# EAGLE board Orbiter_V3_2 (EAGLE 8.7.1)
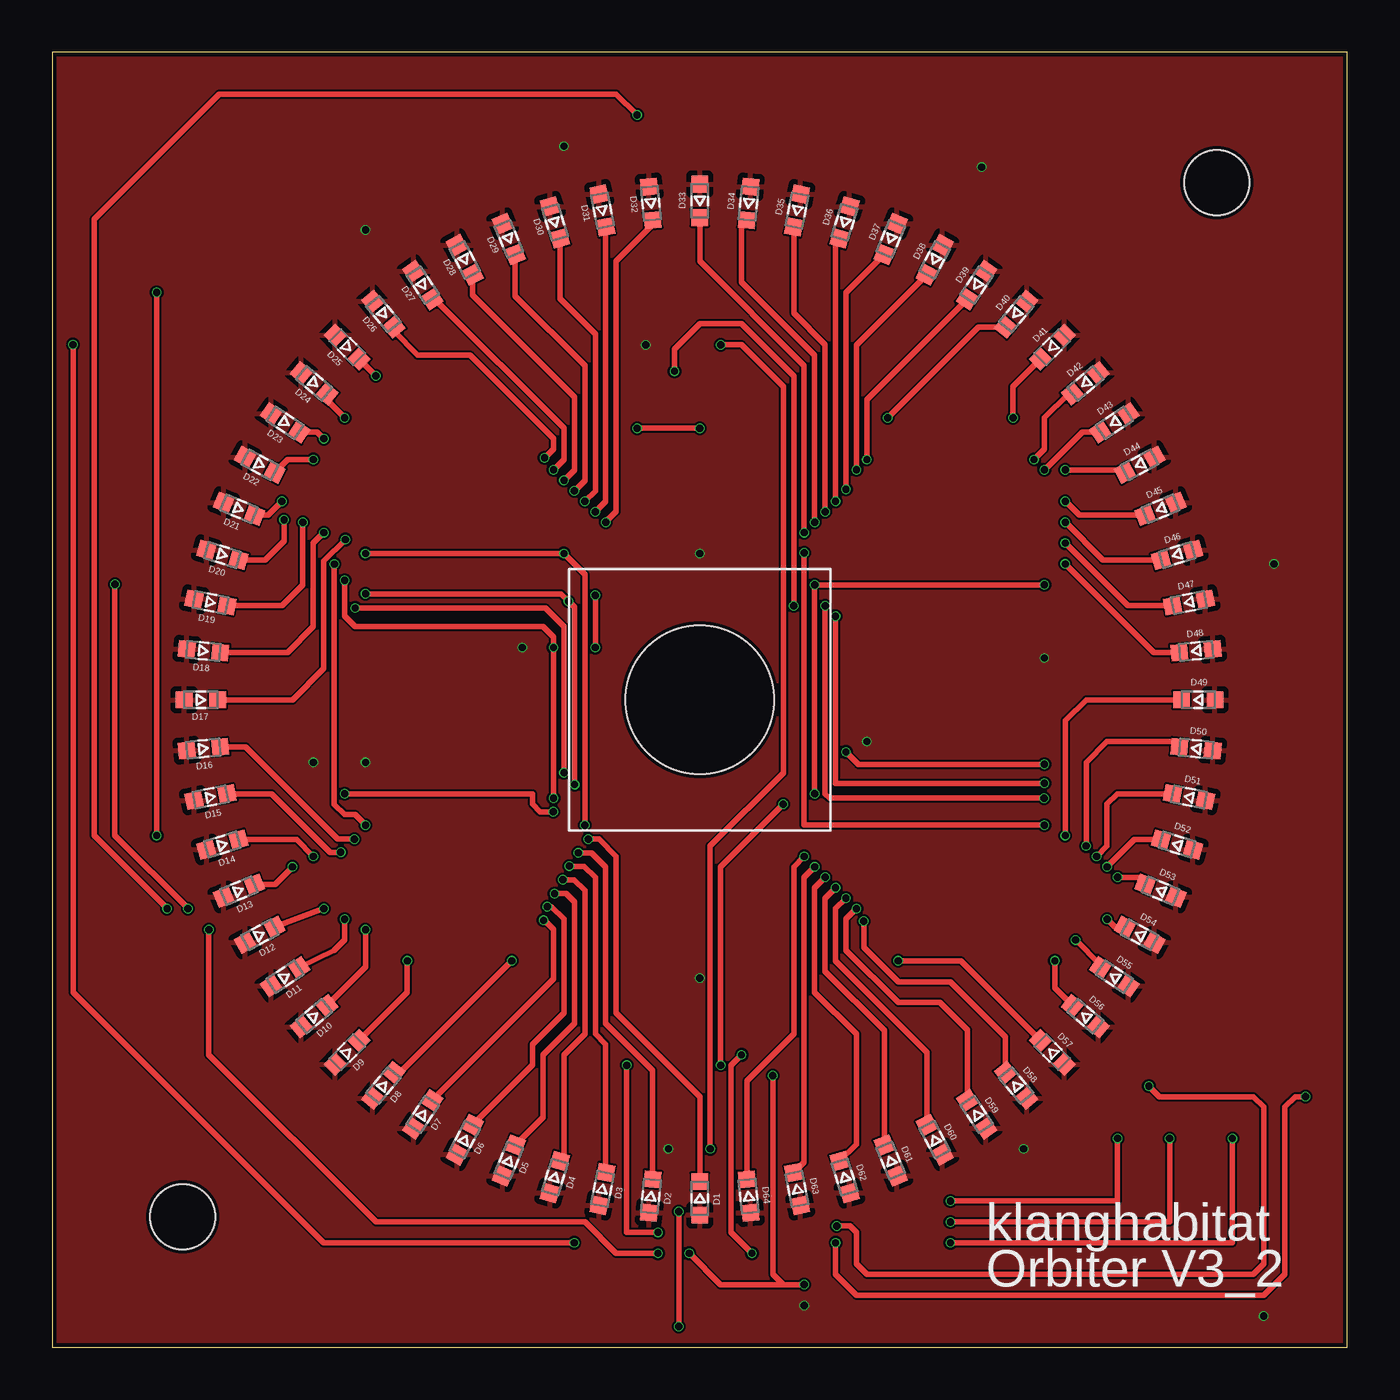
[diagram p0: board, top side]
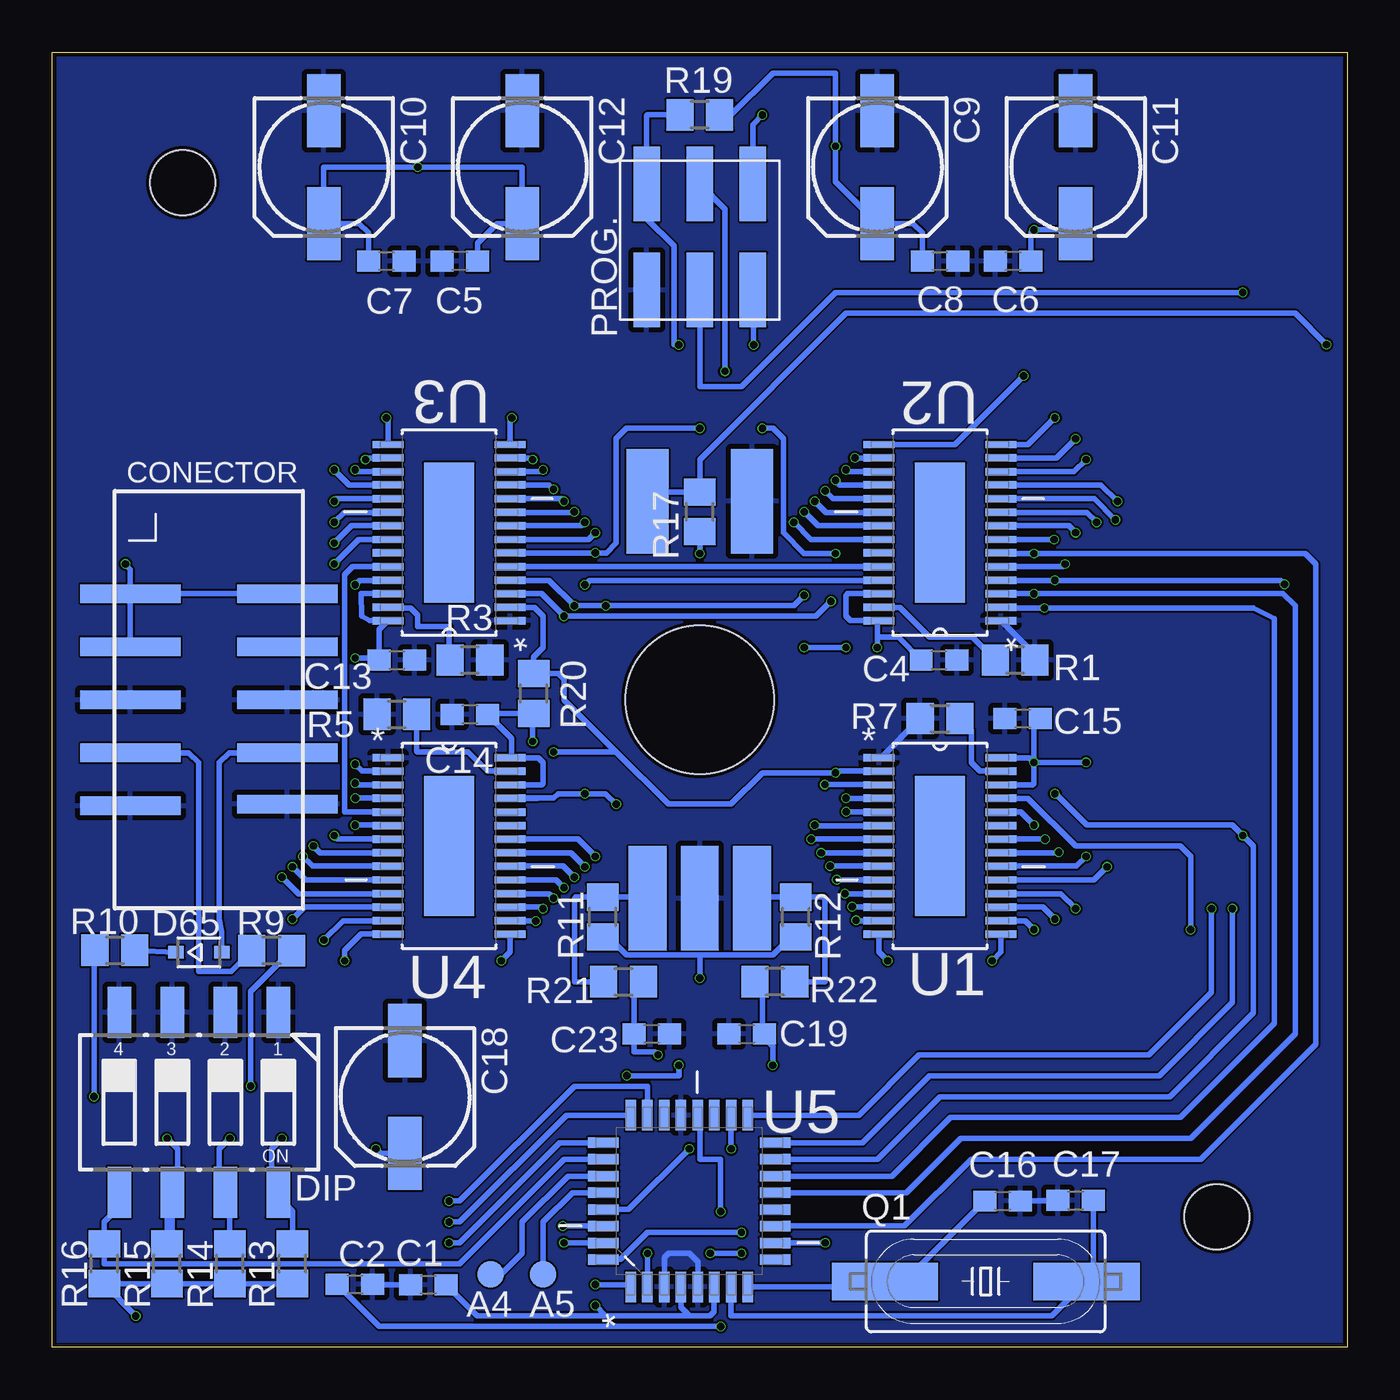
[diagram p1: board, bottom side, seen from below]

Size 62 x 62 mm. Coordinates in mm from the lower left corner, seen from the top.
Outline: 0,0 62,0 62,62 0,62 0,0
Copper layers (1*16): Top 0.035mm / dielectric 1.5mm / Bottom 0.035mm
Design rules "aisler_go_2layer": minimum track width 0.1mm, minimum drill 0.2mm, track to track 0.1mm, track to pad 0.1mm, pad to pad 0.1mm, via to via 0.1mm, smd to smd 0.1mm, copper to edge 0.2mm, drill to drill 0.21mm, minimum pad ring 0.25mm, minimum via ring 0.05mm, stop-mask expansion 0.01mm, vias tented up to drill 0mil, thermal gap 10mil
Holes 3.1 mm at 6.25,6.25 55.75,55.75

## Footprints (pad centres in the part's own frame; a part is rotated, then mirrored left to right if it is on the bottom)
TP = smd 1.27 x 1.27: P$1 0,0
C0603 = smd 1.1 x 1: 1 -0.85,0; 2 0.85,0
153CLV-0605 = smd 3.5 x 1.6: + 2.7,0; - -2.7,0
87832-10 = smd 0.89 x 4.8: 1 -5.08,-3.759; 2 -5.08,3.757; 3 -2.54,-3.759; 4 -2.54,3.757; 5 0,-3.759; 6 0,3.757; 7 2.54,-3.759; 8 2.54,3.757; 9 5.08,-3.759; 10 5,3.757
WL-SMCW_0603 = smd 0.8 x 0.8: 1 -0.8,0; 2 0.8,0
SOD323-R = smd 0.762 x 0.6: A 1.1,0; C -1.1,0
CTS-219-04 = smd 1.13 x 2.44: 1 -3.81,-4.3; 2 -1.27,-4.3; 3 1.27,-4.3; 4 3.81,-4.3; 5 3.81,4.3; 6 1.27,4.3; 7 -1.27,4.3; 8 -3.81,4.3
BOURNS_ENCODER_SMD = smd 2 x 5 bottom: S1 -2.5,9.5; S2 2.5,9.5 | smd 1.8 x 5 bottom: TA 2.5,-9.5; TB -2.5,-9.5; VDC 0,-9.5 | hole 7.1: 0,0
6PIN_HEADER_SMD_OPEN = smd 1.27 x 3.56: 1 -2.54,-2.7; 2 -2.54,2.38; 3 0,-2.7; 4 0,2.38; 5 2.54,-2.7; 6 2.54,2.38
SM49 = smd 5.08 x 1.778: 1 -4.826,0; 2 4.826,0
R0805 = smd 1.3 x 1.5: 1 -0.95,0; 2 0.95,0
SOP65P640X120-29N = smd 1.473 x 0.356: 1 -2.921,4.216; 2 -2.921,3.581; 3 -2.921,2.921; 4 -2.921,2.286; 5 -2.921,1.626; 6 -2.921,0.965; 7 -2.921,0.33; 8 -2.921,-0.33; 9 -2.921,-0.965; 10 -2.921,-1.626; 11 -2.921,-2.286; 12 -2.921,-2.921; 13 -2.921,-3.581; 14 -2.921,-4.216; 15 2.921,-4.216; 16 2.921,-3.581; 17 2.921,-2.921; 18 2.921,-2.286; 19 2.921,-1.626; 20 2.921,-0.965; 21 2.921,-0.33; 22 2.921,0.33; 23 2.921,0.965; 24 2.921,1.626; 25 2.921,2.286; 26 2.921,2.921; 27 2.921,3.581; 28 2.921,4.216 | smd 2.4 x 6.7: THERMAL 0,0
QFP80P900X900X120-32N = smd 1.473 x 0.508: 1 -4.115,2.794; 2 -4.115,2.007; 3 -4.115,1.194; 4 -4.115,0.406; 5 -4.115,-0.406; 6 -4.115,-1.194; 7 -4.115,-2.007; 8 -4.115,-2.794; 17 4.115,-2.794; 18 4.115,-2.007; 19 4.115,-1.194; 20 4.115,-0.406; 21 4.115,0.406; 22 4.115,1.194; 23 4.115,2.007; 24 4.115,2.794 | smd 0.508 x 1.473: 9 -2.794,-4.115; 10 -2.007,-4.115; 11 -1.194,-4.115; 12 -0.406,-4.115; 13 0.406,-4.115; 14 1.194,-4.115; 15 2.007,-4.115; 16 2.794,-4.115; 25 2.794,4.115; 26 2.007,4.115; 27 1.194,4.115; 28 0.406,4.115; 29 -0.406,4.115; 30 -1.194,4.115; 31 -2.007,4.115; 32 -2.794,4.115

## Placement (x,y rotation side)
A4  TPSMD  [TP]  41.02,3.5 180 bottom
A5  TPSMD  [TP]  38.5,3.5 180 bottom
C1  1uF  [C0603]  44,3 0 bottom
C2  100nF  [C0603]  47.5,3.01 180 bottom
C4  100n  [C0603]  19.55,32.9 0 bottom
C5  100n  [C0603]  42.48,52 180 bottom
C6  100n  [C0603]  15.99,52 180 bottom
C7  100n  [C0603]  46,52 0 bottom
C8  100n  [C0603]  19.5,52 0 bottom
C9  10u  [153CLV-0605]  22.5,56.5 270 bottom
C10  10u  [153CLV-0605]  49,56.5 270 bottom
C11  10u  [153CLV-0605]  13,56.5 270 bottom
C12  10u  [153CLV-0605]  39.5,56.5 270 bottom
C13  100n  [C0603]  45.5,32.9 0 bottom
C14  100n  [C0603]  42,30.3 180 bottom
C15  100n  [C0603]  15.55,30.1 180 bottom
C16  22p  [C0603]  16.5,7 0 bottom
C17  22p  [C0603]  13,7.03 0 bottom
C18  4,7uF/16V  [153CLV-0605]  45.11,11.98 270 bottom
C19  10nF  [C0603]  28.75,15 0 bottom
C23  10nF  [C0603]  33.3,15 180 bottom
CONECTOR  10PIN_HEADER_SMD  [87832-10]  54.5,31 270 bottom
D1  SMD_LED_0603  [WL-SMCW_0603]  31,7.13 270 top
D2  SMD_LED_0603  [WL-SMCW_0603]  28.66,7.24 264.4 top
D3  SMD_LED_0603  [WL-SMCW_0603]  26.34,7.58 258.8 top
D4  SMD_LED_0603  [WL-SMCW_0603]  24.07,8.15 253.1 top
D5  SMD_LED_0603  [WL-SMCW_0603]  21.86,8.94 247.5 top
D6  SMD_LED_0603  [WL-SMCW_0603]  19.75,9.94 241.9 top
D7  SMD_LED_0603  [WL-SMCW_0603]  17.74,11.15 236.3 top
D8  SMD_LED_0603  [WL-SMCW_0603]  15.85,12.54 230.6 top
D9  SMD_LED_0603  [WL-SMCW_0603]  14.12,14.12 225 top
D10  SMD_LED_0603  [WL-SMCW_0603]  12.54,15.85 219.4 top
D11  SMD_LED_0603  [WL-SMCW_0603]  11.15,17.74 213.8 top
D12  SMD_LED_0603  [WL-SMCW_0603]  9.94,19.75 208.1 top
D13  SMD_LED_0603  [WL-SMCW_0603]  8.94,21.86 202.5 top
D14  SMD_LED_0603  [WL-SMCW_0603]  8.15,24.07 196.9 top
D15  SMD_LED_0603  [WL-SMCW_0603]  7.58,26.34 191.3 top
D16  SMD_LED_0603  [WL-SMCW_0603]  7.24,28.66 185.6 top
D17  SMD_LED_0603  [WL-SMCW_0603]  7.12,31 180 top
D18  SMD_LED_0603  [WL-SMCW_0603]  7.24,33.34 174.4 top
D19  SMD_LED_0603  [WL-SMCW_0603]  7.58,35.66 168.8 top
D20  SMD_LED_0603  [WL-SMCW_0603]  8.15,37.93 163.1 top
D21  SMD_LED_0603  [WL-SMCW_0603]  8.94,40.14 157.5 top
D22  SMD_LED_0603  [WL-SMCW_0603]  9.94,42.25 151.9 top
D23  SMD_LED_0603  [WL-SMCW_0603]  11.15,44.26 146.3 top
D24  SMD_LED_0603  [WL-SMCW_0603]  12.54,46.15 140.6 top
D25  SMD_LED_0603  [WL-SMCW_0603]  14.12,47.88 135 top
D26  SMD_LED_0603  [WL-SMCW_0603]  15.85,49.46 129.4 top
D27  SMD_LED_0603  [WL-SMCW_0603]  17.74,50.85 123.8 top
D28  SMD_LED_0603  [WL-SMCW_0603]  19.75,52.06 118.2 top
D29  SMD_LED_0603  [WL-SMCW_0603]  21.86,53.06 112.5 top
D30  SMD_LED_0603  [WL-SMCW_0603]  24.07,53.85 106.9 top
D31  SMD_LED_0603  [WL-SMCW_0603]  26.34,54.42 101.3 top
D32  SMD_LED_0603  [WL-SMCW_0603]  28.66,54.76 95.6 top
D33  SMD_LED_0603  [WL-SMCW_0603]  31,54.88 90 top
D34  SMD_LED_0603  [WL-SMCW_0603]  33.34,54.76 84.4 top
D35  SMD_LED_0603  [WL-SMCW_0603]  35.66,54.42 78.8 top
D36  SMD_LED_0603  [WL-SMCW_0603]  37.93,53.85 73.1 top
D37  SMD_LED_0603  [WL-SMCW_0603]  40.14,53.06 67.5 top
D38  SMD_LED_0603  [WL-SMCW_0603]  42.25,52.06 61.9 top
D39  SMD_LED_0603  [WL-SMCW_0603]  44.26,50.85 56.3 top
D40  SMD_LED_0603  [WL-SMCW_0603]  46.15,49.46 50.6 top
D41  SMD_LED_0603  [WL-SMCW_0603]  47.88,47.88 45 top
D42  SMD_LED_0603  [WL-SMCW_0603]  49.46,46.15 39.4 top
D43  SMD_LED_0603  [WL-SMCW_0603]  50.85,44.26 33.8 top
D44  SMD_LED_0603  [WL-SMCW_0603]  52.06,42.25 28.1 top
D45  SMD_LED_0603  [WL-SMCW_0603]  53.06,40.14 22.5 top
D46  SMD_LED_0603  [WL-SMCW_0603]  53.85,37.93 16.9 top
D47  SMD_LED_0603  [WL-SMCW_0603]  54.42,35.66 11.3 top
D48  SMD_LED_0603  [WL-SMCW_0603]  54.76,33.34 5.6 top
D49  SMD_LED_0603  [WL-SMCW_0603]  54.87,31 0 top
D50  SMD_LED_0603  [WL-SMCW_0603]  54.76,28.66 354.4 top
D51  SMD_LED_0603  [WL-SMCW_0603]  54.42,26.34 348.8 top
D52  SMD_LED_0603  [WL-SMCW_0603]  53.85,24.07 343.1 top
D53  SMD_LED_0603  [WL-SMCW_0603]  53.06,21.86 337.5 top
D54  SMD_LED_0603  [WL-SMCW_0603]  52.06,19.75 331.9 top
D55  SMD_LED_0603  [WL-SMCW_0603]  50.85,17.74 326.3 top
D56  SMD_LED_0603  [WL-SMCW_0603]  49.46,15.85 320.6 top
D57  SMD_LED_0603  [WL-SMCW_0603]  47.88,14.12 315 top
D58  SMD_LED_0603  [WL-SMCW_0603]  46.15,12.54 309.4 top
D59  SMD_LED_0603  [WL-SMCW_0603]  44.26,11.15 303.8 top
D60  SMD_LED_0603  [WL-SMCW_0603]  42.25,9.94 298.1 top
D61  SMD_LED_0603  [WL-SMCW_0603]  40.14,8.94 292.5 top
D62  SMD_LED_0603  [WL-SMCW_0603]  37.93,8.15 286.9 top
D63  SMD_LED_0603  [WL-SMCW_0603]  35.66,7.58 281.3 top
D64  SMD_LED_0603  [WL-SMCW_0603]  33.34,7.24 275.6 top
D65  4148  [SOD323-R]  54.98,18.91 0 bottom
DIP  4PIN_DIP  [CTS-219-04]  54.98,11.73 180 bottom
ENC.  BOURNS_ENCODER  [BOURNS_ENCODER_SMD]  31,31 0 top
PROG.  6PIN_HEADER_SMD_OPEN  [6PIN_HEADER_SMD_OPEN]  31,53 180 bottom
Q1  16MHZ  [SM49]  17.31,3.15 180 bottom
R1  2k  [R0805]  15.9,32.9 180 bottom
R3  2k  [R0805]  42,32.9 180 bottom
R5  2k  [R0805]  45.5,30.3 0 bottom
R7  2k  [R0805]  19.5,30.1 0 bottom
R9  1k  [R0805]  51.49,18.99 180 bottom
R10  1k  [R0805]  59,19 0 bottom
R11  10k  [R0805]  35.65,20.6 90 bottom
R12  10k  [R0805]  26.4,20.6 90 bottom
R13  10k  [R0805]  50.5,4 90 bottom
R14  10k  [R0805]  53.5,4 90 bottom
R15  10k  [R0805]  56.5,4 90 bottom
R16  10k  [R0805]  59.5,4 90 bottom
R17  10k  [R0805]  31,40 90 bottom
R19  10k  [R0805]  31,59 180 bottom
R20  10k  [R0805]  38.95,31.3 90 bottom
R21  10k  [R0805]  34.65,17.5 0 bottom
R22  10k  [R0805]  27.4,17.5 180 bottom
U1  TLC5940  [SOP65P640X120-29N]  19.5,24 0 bottom
U2  TLC5940  [SOP65P640X120-29N]  19.5,39 180 bottom
U3  TLC5940  [SOP65P640X120-29N]  43,39 180 bottom
U4  TLC5940  [SOP65P640X120-29N]  43,24 0 bottom
U5  ATMEGA328  [QFP80P900X900X120-32N]  31.5,7 90 bottom

## Library data of the parts
A4 A5 C1 C2 C4-C19 C23 CONECTOR D1-D65 DIP ENC. PROG. Q1 R1 R3 R5 R7 R9-R17 R19-R22 = C_Sager_Bibliothek
U1-U4 = C_Sager_Bibliothek; MPN: TLC59401PWP; OC_FARNELL: -; OC_NEWARK: 64R0661; PACKAGE: TSSOP-28; SUPPLIER: Texas Instruments
U5 = C_Sager_Bibliothek; MPN: ATMEGA328P-AU; OC_FARNELL: 1715486; OC_NEWARK: 14R4631; PACKAGE: TQFP-32; SUPPLIER: Atmel

## Nets
A0: DIP.8 R13.2 U5.23
A1: DIP.7 R14.2 U5.24
A2: DIP.6 R15.2 U5.25
A3: DIP.5 R16.2 U5.26
A4: A4.P$1 U5.27
A5: A5.P$1 U5.28
A6: U5.19
A7: U5.22
D0/RX: R9.1 U5.30
D1/TX: R10.1 U5.31
D2/TB: C19.2 R22.2 U5.32
D3/GSCLK: U1.25 U2.25 U3.25 U4.25 U5.1
D4/TA: C23.2 R21.2 U5.2
D5: U5.9
D6/SWITCH: ENC..S2 R17.2 U5.10
D7/MODE: U1.6 U2.6 U3.6 U4.6 U5.11
D8/WS2812: U5.12
D9/XLAT: U1.3 U2.3 U3.3 U4.3 U5.13
D10/BLANK: R20.2 U1.2 U2.2 U3.2 U4.2 U5.14
D11/MOSI/SIN: PROG..4 U1.5 U5.15
D12/MISO: PROG..1 U5.16
D13/SCK: PROG..3 U1.4 U2.4 U3.4 U4.4 U5.17
GND: C1.1 C2.1 C4.2 C5.2 C6.2 C7.2 C8.2 C9.- C10.- C11.- C12.- C13.2 C14.2 C15.2 C16.2 C17.1 C18.- C19.1 C23.1 CONECTOR.5 CONECTOR.6 CONECTOR.9 CONECTOR.10 DIP.1 DIP.2 DIP.3 DIP.4 ENC..S1 ENC..VDC PROG..6 R1.1 R3.1 R5.1 R7.1 U1.1 U2.1 U3.1 U4.1 U5.3 U5.5 U5.21
IREF_U1: R1.2 U2.27
IREF_U2: R3.2 U3.27
IREF_U3: R5.2 U4.27
IREF_U4: R7.2 U1.27
N$1: D17.1 U2.7
N$2: U1.24 U2.5
N$3: D18.1 U2.8
N$4: D24.1 U2.14
N$5: D19.1 U2.9
N$6: D25.1 U2.15
N$7: D20.1 U2.10
N$8: D26.1 U2.16
N$9: D21.1 U2.11
N$10: D22.1 U2.12
N$11: D23.1 U2.13
N$12: D27.1 U2.17
N$13: D28.1 U2.18
N$14: D29.1 U2.19
N$15: D30.1 U2.20
N$16: D31.1 U2.21
N$17: D32.1 U2.22
N$19: D33.1 U3.7
N$20: D34.1 U3.8
N$21: D35.1 U3.9
N$22: D36.1 U3.10
N$23: D37.1 U3.11
N$24: D38.1 U3.12
N$25: D39.1 U3.13
N$26: D40.1 U3.14
N$27: D41.1 U3.15
N$28: D42.1 U3.16
N$29: D43.1 U3.17
N$31: D44.1 U3.18
N$32: D45.1 U3.19
N$33: D46.1 U3.20
N$34: D47.1 U3.21
N$35: D48.1 U3.22
N$39: D49.1 U4.7
N$40: D50.1 U4.8
N$41: D51.1 U4.9
N$42: D52.1 U4.10
N$43: D53.1 U4.11
N$44: D54.1 U4.12
N$45: D55.1 U4.13
N$46: D56.1 U4.14
N$47: D57.1 U4.15
N$48: D58.1 U4.16
N$49: D59.1 U4.17
N$50: D60.1 U4.18
N$51: D61.1 U4.19
N$52: D62.1 U4.20
N$53: D63.1 U4.21
N$54: D64.1 U4.22
N$58: D1.1 U1.7
N$59: D2.1 U1.8
N$60: D3.1 U1.9
N$61: D4.1 U1.10
N$62: D5.1 U1.11
N$63: D6.1 U1.12
N$64: D7.1 U1.13
N$65: D8.1 U1.14
N$66: D9.1 U1.15
N$67: D10.1 U1.16
N$68: D11.1 U1.17
N$69: D12.1 U1.18
N$70: D13.1 U1.19
N$71: D14.1 U1.20
N$72: D15.1 U1.21
N$73: D16.1 U1.22
N$77: D65.C R10.2
N$81: C17.2 Q1.1 U5.7
N$82: C16.1 Q1.2 U5.8
N$90: C2.2 U5.20
RESET: PROG..5 R19.2 U5.29
RX: CONECTOR.7 R9.2
SIN_U2: U2.24 U3.5
SIN_U3: U3.24 U4.5
TA: ENC..TA R11.2 R21.1
TB: ENC..TB R12.2 R22.1
TX: CONECTOR.8 D65.A
VCC: C1.2 C4.1 C5.1 C6.1 C7.1 C8.1 C9.+ C10.+ C11.+ C12.+ C13.1 C14.1 C15.1 C18.+ CONECTOR.1 CONECTOR.2 CONECTOR.3 D1.2 D2.2 D3.2 D4.2 D5.2 D6.2 D7.2 D8.2 D9.2 D10.2 D11.2 D12.2 D13.2 D14.2 D15.2 D16.2 D17.2 D18.2 D19.2 D20.2 D21.2 D22.2 D23.2 D24.2 D25.2 D26.2 D27.2 D28.2 D29.2 D30.2 D31.2 D32.2 D33.2 D34.2 D35.2 D36.2 D37.2 D38.2 D39.2 D40.2 D41.2 D42.2 D43.2 D44.2 D45.2 D46.2 D47.2 D48.2 D49.2 D50.2 D51.2 D52.2 D53.2 D54.2 D55.2 D56.2 D57.2 D58.2 D59.2 D60.2 D61.2 D62.2 D63.2 D64.2 PROG..2 R11.1 R12.1 R13.1 R14.1 R15.1 R16.1 R17.1 R19.1 R20.1 U1.26 U1.28 U2.26 U2.28 U3.26 U3.28 U4.26 U4.28 U5.4 U5.6 U5.18

## Tracks (layer width: path | path; a pad name or v marks a point on that pad's centre or on a via)
A0  (via drill 0.35)
  Top 0.254: v43,7 51,7 v51,10
  Bottom 0.254: 50.45,5 R13.2 50.5,6.5 51,7 DIP.8 51.17,7.17 51.5,7.5 51.5,9.5 v51,10 | U5.23 33.5,11.12 33.5,12.5 37,12.5 42.5,7 v43,7
A1  (via drill 0.35)
  Top 0.254: v43,6 53.5,6 v53.5,10
  Bottom 0.254: U5.24 37.38,11.12 42.5,6 v43,6 | R14.2 53.5,6.5 53.71,6.71 53.71,7 | DIP.7 53.71,7 | v53.5,10 54,9.5 54,8 | 54,8 54,7.5 | 54,8 53.71,7
A2  (via drill 0.35)
  Top 0.254: v43,5 56.5,5 v56.5,10
  Bottom 0.254: R15.2 56.25,5.2 DIP.6 56.25,7 | U5.25 37.71,9.79 42.5,5 v43,5 | 56.45,5 R15.2 | 56.25,7 56.25,6.75 56.5,6.5 R15.2 | v56.5,10 56,9.5 56,8.5 56.25,7
A3
  Bottom 0.254: U5.26 35.62,9 37.5,9 42.5,4 59.5,4 R16.2 | R16.2 59.45,5 | R16.2 59.5,6 59,6.5 59,7.22 DIP.5
A4
  Bottom 0.254: U5.27 37.31,8.19 39.5,6 39.5,4.5 40.5,3.5 A4.P$1
A5
  Bottom 0.254: U5.28 37.09,7.41 38.5,6 A5.P$1
D0/RX  (via drill 0.35)
  Top 0.254: v52.5,12.5 53,12 57.5,12 58,11.5 58,4 57.5,3.5 39,3.5 38.5,4 38.5,5.5 38.19,5.81 v37.55,5.81
  Bottom 0.254: U5.30 37.31,5.81 v37.55,5.81 | R9.1 52.5,17.04 v52.5,12.5
D1/TX  (via drill 0.35)
  Top 0.254: v37.5,5 37.5,3.5 38.5,2.5 58,2.5 59,3.5 59,11.5 59.5,12 v60,12
  Bottom 0.254: U5.31 35.62,5 v37.5,5 | v60,12 60,18.95 R10.1
D2/TB  (via drill 0.35)
  Top 0.254: v27.5,13.5 27.5,5.5 v29,5.5
  Bottom 0.254: U5.32 34.79,4.21 33.5,5.5 v29,5.5 | 28,14.9 C19.2 | R22.2 28,17.15 28,14.9 | v27.5,13.5 27.5,14.4 28,14.9
D3/GSCLK  (via drill 0.35)
  Top 0.254: v30.5,4.5 32,3 35,3 | v29,4.5 27,4.5 25.5,6 15.5,6 7.5,14 v7.5,20 | v36,3 35,3 | v47.5,36.5 v36.5,36.5 v36.5,26.5 | 35,3 34.5,3.5 v34.5,13 | v32,13.5 32,23 v35,26
  Bottom 0.254: U5.1 34.41,3 v36,3 | v30.5,4.5 v29,4.5 | v7.5,20 7.5,23.5 8,24 13,24 15.29,26.29 U1.25 | U2.25 36.29,36.71 v36.5,36.5 | v47.5,36.5 47.29,36.71 U3.25 | 38.79,26.29 40,26.29 | 40,26.29 U4.25 | v34.5,13 32,13 v32,13.5 | 40,26.29 38,26.29 37.79,26.5 v36.5,26.5 35.5,26.5 v35,26
D4/TA  (via drill 0.35)
  Top 0.254: v33.5,4.5 32.5,5.5 32.5,13.5 v33,14
  Bottom 0.254: 33.5,2.88 U5.2 v33.51,4.49 v33.5,4.5 | R21.2 34.15,17.05 C23.2 34.15,14.15 33.15,14.15 v33,14
D6/SWITCH  (via drill 0.35)
  Top 0.254: v25,5 13,5 1,17 v1,48
  Bottom 0.254: U5.10 v25.01,4.99 v25,5 | v1,48 2.5,49.5 24,49.5 31,42.5 R17.2 33.05,40.95 ENC..S2
D7/MODE  (via drill 0.35)
  Top 0.254: v25.5,25 25.5,37 v24.5,38 v15,38 | v31,44 v28,44 | v47.5,25 36,25 v36,38.03
  Bottom 0.254: U2.6 16.54,38 v15,38 2,38 1.5,37.5 1.5,14.5 7,9 18,9 21.19,5.81 U5.11 | U1.6 25.46,24.96 v25.5,25 | v28,44 27.5,44 27,43.5 27,39 26,38 v24.5,38 | U3.6 v36,38.03 35.47,38.03 35,38.5 35,43.5 34.5,44 v31,44 | U4.6 45.96,25 v47.5,25
D9/XLAT  (via drill 0.35)
  Top 0.254: v25.01,26.94 25,35.43 v24.71,35.72 24.36,36.07 v15.01,36.07 v15,36.08 | v47.5,27 37.5,27 v37.5,35
  Bottom 0.254: U2.3 v15,36.08 3.08,36.08 2.5,35.5 2.5,15 7.5,10 18.5,10 21.09,7.41 U5.13 | U1.3 22.51,26.94 v25.01,26.94 | U3.3 38.58,36.08 v37.5,35 25.43,35 v24.71,35.72 | U4.3 47.42,26.92 v47.5,27
D10/BLANK  (via drill 0.35)
  Top 0.254: v24.5,27.5 24.5,34.5 23.61,35.39 v14.5,35.39 | v47.5,27.91 38.59,27.91 v38,28.5
  Bottom 0.254: U2.2 16.55,35.39 v14.5,35.39 4.51,35.39 3.5,34.88 3.5,15.5 8,11 19,11 21.81,8.19 U5.14 | U1.2 24.42,27.58 v24.5,27.5 28,27.5 29.5,26 32.5,26 35,28.5 | U3.2 38.92,35.42 38.5,35 38.5,33.5 38.95,33.05 R20.2 37.75,32.25 37.5,32 37.5,31 35,28.5 | U4.2 47.17,27.58 v47.5,27.91 | v38,28.5 35,28.5
D11/MOSI/SIN  (via drill 0.35)
  Top 0.254: v14,26.5 23,26.5 23,26 23.36,25.64 v23.99,25.64 | v5,50.5 v5,24.5
  Bottom 0.254: v23.99,25.64 23.85,25.63 U1.5 | U5.15 22.49,9.01 19.5,12 8.5,12 4.5,16 4.5,24 v5,24.5 5.5,25 12.46,25 13.96,26.5 v14,26.5 | PROG..4 31,46 29,46 24.5,50.5 v5,50.5
D12/MISO  (via drill 0.35)
  Top 0.254: v5.5,21 2,24.5 2,54 8,60 27,60 v28,59
  Bottom 0.254: v28,59 28.46,58.54 PROG..1 | U5.16 23.21,9.79 20,13 9,13 5.5,16.5 v5.5,21
D13/SCK  (via drill 0.35)
  Top 0.254: v6.5,21 3,24.5 v3,36.53 | v24,26.29 v24,33.5 24,34 23.5,34.5 14.5,34.5 14,35 v14,36.71 | v29.79,46.73 29.79,47.79 31,49 33,49 35.5,46.5 v35.5,35.5 | v26,36 v26,33.5 | v47.49,26.29 37.21,26.29 37,26.5 v37,35.5
  Bottom 0.254: U2.4 v14,36.71 3.18,36.71 v3,36.53 | U5.17 23.39,11.12 20.5,14 9.5,14 6.5,17 v6.5,21 | U1.4 v24,26.29 | PROG..3 29.79,54.49 v29.79,46.73 | U3.4 38.21,36.71 v37,35.5 v35.5,35.5 26.5,35.5 v26,36 | v26,33.5 v24,33.5 | U4.4 v47.49,26.29
GND
  Bottom 0.254: C17.1 13.88,7 C16.2 | U5.5 31.09,4.09 31.5,4.5 32.5,4.5 32.69,4.31 U5.3 | C1.1 46.64,3 C2.1 | U2.1 14.95,33.16 R1.1 | R7.1 22.33,28.22 U1.1
  pour Bottom: -1.5,62.5 -1.5,-1.5 63.5,-1.5 63.5,62.5
IREF_U1
  Bottom 0.254: U2.27 21.42,35.42 20,34 17.95,34 R1.2
IREF_U2
  Bottom 0.254: R3.2 43,32.95 43,34.5 44.5,34.5 44.5,35.05 44.85,35.4 45.9,35.4 U3.27
IREF_U3
  Bottom 0.254: U4.27 41.16,27.58 42.08,28.5 44.5,28.5 44.55,28.55 R5.2
IREF_U4
  Bottom 0.254: R7.2 18,29.55 18,28 17.58,27.58 U1.27
N$1  (via drill 0.35)
  Top 0.254: v14.04,38.67 13,37.63 13,32.5 11.5,31 D17.1
  Bottom 0.254: U2.7 v14.04,38.67 | v14.04,38.67
N$2  (via drill 0.35)
  Top 0.254: v13.51,37.49 13.51,26 14,25.5 14.5,25.5 v15,25
  Bottom 0.254: U2.5 13.63,37.37 v13.51,37.49 | U1.24 15.63,25.63 v15,25
N$3  (via drill 0.35)
  Top 0.254: v13,39 12.5,38.5 12.5,34.5 11.26,33.26 D18.1
  Bottom 0.254: U2.8 13.33,39.33 v13,39
N$4  (via drill 0.35)
  Top 0.254: v14,44.5 13.16,45.34 D24.1
  Bottom 0.254: U2.14 15.28,43.22 v14,44.5
N$5  (via drill 0.35)
  Top 0.254: v12,39.5 12,36.5 11.01,35.51 D19.1
  Bottom 0.254: U2.9 12.46,39.97 v12,39.5
N$6  (via drill 0.35)
  Top 0.254: v15.5,46.5 D25.1 | D25.1
  Bottom 0.254: U2.15 18.78,43.22 v15.5,46.5
N$7  (via drill 0.35)
  Top 0.254: v11.1,39.61 11.1,38.6 10.2,37.7 D20.1
  Bottom 0.254: U2.10 12.12,40.63 v11.1,39.61
N$8  (via drill 0.35)
  Top 0.254: v23.57,42.58 23.99,43 24,43 24,43.5 20,47.5 17.5,47.5 16.36,48.64 D26.1
  Bottom 0.254: U2.16 23.6,42.58 v23.57,42.58
N$9  (via drill 0.35)
  Top 0.254: v11,40.5 10.33,39.83 D21.1
  Bottom 0.254: U2.11 11.79,41.29 v11,40.5
N$10  (via drill 0.35)
  Top 0.254: v12.5,42.5 11.27,42.5 D22.1
  Bottom 0.254: U2.12 13.08,41.92 v12.5,42.5
N$11  (via drill 0.35)
  Top 0.254: v13,43.5 12.68,43.82 D23.1
  Bottom 0.254: U2.13 13.92,42.58 v13,43.5
N$12  (via drill 0.35)
  Top 0.254: v24,42 24.5,42.5 24.5,44 18.32,50.19 D27.1
  Bottom 0.254: U2.17 23.92,41.92 v24,42
N$13  (via drill 0.35)
  Top 0.254: v24.5,41.5 25,42 25,45.5 20.13,50.37 D28.1
  Bottom 0.254: U2.18 24.29,41.29 v24.5,41.5
N$14  (via drill 0.35)
  Top 0.254: v25,41 25.5,41.5 25.5,47 22.17,50.33 D29.1
  Bottom 0.254: U2.19 24.63,40.63 v25,41
N$15  (via drill 0.35)
  Top 0.254: v25.5,40.5 26,41 26,48.5 24.3,50.2 D30.1
  Bottom 0.254: U2.20 24.96,39.97 v25.5,40.5
N$16  (via drill 0.35)
  Top 0.254: v26,40 26.5,40.5 D31.1
  Bottom 0.254: U2.21 25.33,39.33 v26,40
N$17  (via drill 0.35)
  Top 0.254: v26.5,39.5 27,40 27,52 28.74,53.74 D32.1
  Bottom 0.254: U2.22 25.67,38.67 v26.5,39.5
N$19  (via drill 0.35)
  Top 0.254: v36,39 36,47 31,52 D33.1
  Bottom 0.254: U3.7 36.33,38.67 v36,39
N$20  (via drill 0.35)
  Top 0.254: v36.5,39.5 36.5,47.5 33,51 33,53.7 D34.1
  Bottom 0.254: U3.8 36.67,39.33 v36.5,39.5
N$21  (via drill 0.35)
  Top 0.254: v37,40 37,48 35.5,49.5 D35.1
  Bottom 0.254: U3.9 37.03,39.97 v37,40
N$22  (via drill 0.35)
  Top 0.254: v37.5,40.5 37.5,52.89 D36.1
  Bottom 0.254: U3.10 37.63,40.63 v37.5,40.5
N$23  (via drill 0.35)
  Top 0.254: v38,41.08 38,50.49 D37.1
  Bottom 0.254: U3.11 38.21,41.29 v38,41.08
N$24  (via drill 0.35)
  Top 0.254: v38.5,42 38.5,47.98 D38.1
  Bottom 0.254: U3.12 38.58,41.92 v38.5,42
N$25  (via drill 0.35)
  Top 0.254: v39,42.5 39,45.37 D39.1
  Bottom 0.254: U3.13 39.08,42.58 v39,42.5
N$26  (via drill 0.35)
  Top 0.254: v40,44.5 44.34,48.84 D40.1
  Bottom 0.254: U3.14 40.08,44.42 v40,44.5
N$27  (via drill 0.35)
  Top 0.254: v46,44.5 46,46 D41.1
  Bottom 0.254: U3.15 45.92,44.42 v46,44.5
N$28  (via drill 0.35)
  Top 0.254: v47,42.5 47.5,43 47.5,44.5 48.64,45.64 D42.1
  Bottom 0.254: U3.16 46.92,42.58 v47,42.5
N$29  (via drill 0.35)
  Top 0.254: v47.5,42 49.31,43.81 D43.1
  Bottom 0.254: U3.17 47.42,41.92 v47.5,42
N$31  (via drill 0.35)
  Top 0.254: v48.5,42 51.23,42 D44.1
  Bottom 0.254: U3.18 47.79,41.29 v48.5,42
N$32  (via drill 0.35)
  Top 0.254: v48.5,40.5 49.17,39.83 D45.1
  Bottom 0.254: U3.19 48.37,40.63 v48.5,40.5
N$33  (via drill 0.35)
  Top 0.254: v48.5,39.5 50.3,37.7 D46.1
  Bottom 0.254: U3.20 48.03,39.97 v48.5,39.5
N$34  (via drill 0.35)
  Top 0.254: v48.5,38.5 51.5,35.5 D47.1
  Bottom 0.254: U3.21 47.67,39.33 v48.5,38.5
N$35  (via drill 0.35)
  Top 0.254: v48.5,37.5 52.74,33.26 D48.1
  Bottom 0.254: U3.22 47.33,38.67 v48.5,37.5
N$39  (via drill 0.35)
  Top 0.254: v48.5,24.5 48.5,30 49.5,31 D49.1
  Bottom 0.254: U4.7 48.33,24.33 v48.5,24.5
N$40  (via drill 0.35)
  Top 0.254: v49.5,24 49.5,28 50.5,29 53.7,29 D50.1
  Bottom 0.254: U4.8 49.17,23.67 v49.5,24
N$41  (via drill 0.35)
  Top 0.254: v50,23.5 50.5,24 50.5,26 50.99,26.5 D51.1
  Bottom 0.254: U4.9 49.53,23.04 v50,23.5
N$42  (via drill 0.35)
  Top 0.254: v50.5,23 51.8,24.3 D52.1
  Bottom 0.254: U4.10 49.87,22.37 v50.5,23
N$43  (via drill 0.35)
  Top 0.254: v51,22.5 51.99,22.5 D53.1
  Bottom 0.254: U4.11 50.21,21.71 v51,22.5
N$44  (via drill 0.35)
  Top 0.254: v50.5,20.5 50.87,20.13 D54.1
  Bottom 0.254: U4.12 49.92,21.08 v50.5,20.5
N$45  (via drill 0.35)
  Top 0.254: v49,19.5 50.18,18.32 D55.1
  Bottom 0.254: U4.13 48.08,20.42 v49,19.5
N$46  (via drill 0.35)
  Top 0.254: v48,18.5 48,17.2 D56.1
  Bottom 0.254: U4.14 47.22,19.78 48,19 v48,18.5
N$47  (via drill 0.35)
  Top 0.254: v40.5,18.5 43.5,18.5 D57.1
  Bottom 0.254: U4.15 40.08,18.92 v40.5,18.5
N$48  (via drill 0.35)
  Top 0.254: v38.85,20.4 38.85,19.15 40.5,17.5 43,17.5 45.64,14.86 D58.1
  Bottom 0.254: U4.16 38.87,20.42 v38.85,20.4
N$49  (via drill 0.35)
  Top 0.254: v38.5,21 38,20.5 38,19 40.5,16.5 42.5,16.5 43.81,15.19 D59.1
  Bottom 0.254: U4.17 38.58,21.08 v38.5,21
N$50  (via drill 0.35)
  Top 0.254: v38,21.5 37.5,21 37.5,18.5 41.87,14.13 D60.1
  Bottom 0.254: U4.18 38.21,21.71 v38,21.5
N$51  (via drill 0.35)
  Top 0.254: v37.5,22 37,21.5 37,18 39.83,15.17 D61.1
  Bottom 0.254: U4.19 37.87,22.37 v37.5,22
N$52  (via drill 0.35)
  Top 0.254: v37,22.5 36.5,22 36.5,17 38.5,15 38.5,9.72 D62.1
  Bottom 0.254: U4.20 37.53,23.04 v37,22.5
N$53  (via drill 0.35)
  Top 0.254: v36.5,23 36,22.5 36,8.86 D63.1
  Bottom 0.254: U4.21 37.17,23.67 v36.5,23
N$54  (via drill 0.35)
  Top 0.254: v36,23.5 35.5,23 35.5,15 33.26,12.76 D64.1
  Bottom 0.254: U4.22 36.83,24.33 v36,23.5
N$58  (via drill 0.35)
  Top 0.254: v25.66,24.33 26.17,24.33 27,23.5 27,16 31,12 D1.1
  Bottom 0.254: v25.66,24.33 U1.7 | U1.7
N$59  (via drill 0.35)
  Top 0.254: D2.1 28.74,13.26 26.5,15.5 26.5,23 25.83,23.67 v25.18,23.67
  Bottom 0.254: v25.18,23.67 | v25.18,23.67 U1.8
N$60  (via drill 0.35)
  Top 0.254: v24.76,23.04 v24.77,23.03 25.47,23.03 26,22.5 26,15 26.5,14.5 26.5,14.49 D3.1
  Bottom 0.254: v24.76,23.04 v24.75,23.04 U1.9
N$61  (via drill 0.35)
  Top 0.254: D4.1 24.5,9.11 24.5,14 25.5,15 25.5,21.87 24.99,22.38 v24.44,22.38
  Bottom 0.254: v24.44,22.38 U1.10
N$62  (via drill 0.35)
  Top 0.254: D5.1 23.5,11.01 23.5,14 25,15.5 25,21.32 24.6,21.72 v24.06,21.72 v24.05,21.71
  Bottom 0.254: v24.05,21.71 U1.11
N$63  (via drill 0.35)
  Top 0.254: D6.1 23,13.52 23,14.5 24.5,16 24.5,20.5 23.91,21.09 v23.7,21.09
  Bottom 0.254: v23.7,21.09 22.43,21.09 U1.12
N$64  (via drill 0.35)
  Top 0.254: v23.52,20.44 23.56,20.44 24,20 24,17.63 D7.1
  Bottom 0.254: U1.13 23.5,20.42 v23.52,20.44
N$65  (via drill 0.35)
  Top 0.254: v22,18.5 16.66,13.16 D8.1
  Bottom 0.254: U1.14 22.42,18.92 v22,18.5
N$66  (via drill 0.35)
  Top 0.254: v17,18.5 17,17 D9.1
  Bottom 0.254: U1.15 16.58,18.92 v17,18.5
N$67  (via drill 0.35)
  Top 0.254: v15,20 15,18.2 D10.1
  Bottom 0.254: U1.16 15.42,20.42 v15,20
N$68  (via drill 0.35)
  Top 0.254: v14,20.5 14,19.5 13.5,19 D11.1
  Bottom 0.254: U1.17 14.58,21.08 v14,20.5
N$69  (via drill 0.35)
  Top 0.254: v13,21 D12.1
  Bottom 0.254: U1.18 13.71,21.71 v13,21
N$70  (via drill 0.35)
  Top 0.254: v11.5,23 10.67,22.17 D13.1
  Bottom 0.254: U1.19 12.13,22.37 v11.5,23
N$71  (via drill 0.35)
  Top 0.254: v12.5,23.5 11.7,24.3 D14.1
  Bottom 0.254: U1.20 12.96,23.04 v12.5,23.5
N$72  (via drill 0.35)
  Top 0.254: v13.81,23.7 13.3,23.7 10.5,26.5 D15.1
  Bottom 0.254: U1.21 13.84,23.67 v13.81,23.7
N$73  (via drill 0.35)
  Top 0.254: v14.47,24.33 13.67,24.33 9.26,28.74 D16.1
  Bottom 0.254: U1.22 v14.47,24.33 | v14.47,24.33
N$77
  Bottom 0.254: D65.C R10.2
N$81
  Bottom 0.254: U5.7 29.49,1.51 29.5,1.5 14.13,1.5 Q1.1 12.15,3.48 C17.2
N$82
  Bottom 0.254: Q1.2 22.4,2.88 | 22.4,2.88 U5.8 | C16.1 21.47,2.88 22.4,2.88
N$90  (via drill 0.35)
  Top 0.254: v30,6.5 v30,1
  Bottom 0.254: C2.2 46.34,1 v30,1 | U5.20 31,11.02 31,9 30,9 v30,6.5
RESET  (via drill 0.35)
  Top 0.254: v31.5,9.5 31.5,24 35,27.5 35,46 33,48 v32,47.99
  Bottom 0.254: U5.29 34.41,6.59 v31.5,9.5 | R19.2 33.5,59 33.54,58.96 PROG..5 33.54,54.04 32.23,52.73 32.23,47.99 v32,47.99
RX
  Bottom 0.254: 58.72,28.5 CONECTOR.7 55.46,28.46 55,28 55,18 53.44,18 R9.2
SIN_U2
  Bottom 0.254: U2.24 U3.5
SIN_U3
  Bottom 0.254: U3.24 47.63,37.37 48,37 48,25.63 47.17,25.63 47.05,25.63 U4.5
TA
  Bottom 0.254: ENC..TA 33.55,21.55 R11.2 36.95,21.55 37,21.5 37,17.5 R21.1
TB
  Bottom 0.254: R22.1 25,17.5 25,21.5 25.05,21.55 R12.2 28.45,21.55 ENC..TB
TX
  Bottom 0.254: D65.A 53.88,19.88 54,20.5 54,28 53.54,28.46 CONECTOR.8
VCC  (via drill 0.35)
  Bottom 0.254: U5.6 30.31,1.69 30.5,1.5 31.5,1.5 | 31.5,1.5 31.91,1.91 U5.4 | R13.1 R14.1 R15.1 R16.1 v58,1.5 | 43,3 C1.2 41.65,1.5 35.5,1.5 | 31.5,1.5 35.5,1.5 | 35.5,1.5 v36,2 | R12.1 26.63,19.65 27.51,18.77 31,18.77 | R11.1 35.37,19.65 34.49,18.77 31,18.77 | 31,18.77 v31,17.68 | U5.18 v29.5,9.5 | CONECTOR.1 CONECTOR.3 | CONECTOR.1 CONECTOR.2 | CONECTOR.1 58.26,37.24 v58.5,37.5 | C7.1 46.85,53.35 47.3,53.8 C10.+ 49,56.5 v44.5,56.5 39.5,56.5 C12.+ 40.7,53.8 41.63,52.87 C5.1 | PROG..2 28.46,51.04 v28.42,47.99 | C11.+ 13.3,53.5 v15,53.5 15.14,53.36 C6.1 | C8.1 20.35,53.35 20.8,53.8 C9.+ 24.5,55.8 v24.5,57.5 24.5,61 27.5,61 29.5,59 R19.1 | C4.1 21.5,34 22.5,34 | 22.5,34 22.5,34.7 U2.28 23.78,34.78 24,35 24,36 23.92,36.08 U2.26 | U1.26 15.08,26.92 15,27 v15,28 | v15,28 15.22,28.22 U1.28 | C15.1 15,29.8 v15,28 | 22.5,34 v22.5,33.5 | v15,28 v12.5,28 | R17.1 v31,38 | U4.28 40,28.22 | 40,28.22 38.72,28.22 38.5,28 38.5,27 38.58,26.92 39.98,26.92 U4.26 | 40,28.22 40,29.15 C14.1 41.1,30.35 R20.1 39,30.3 v39,29 | v47.5,33 46.45,33 C13.1 46.35,34.35 U3.28 46.81,34.8 47.19,35.02 47.2,36.08 46.04,36.08 U3.26 | C18.+ 46.28,9.28 v46.5,9.5
  pour Top: -0.5,63 -0.5,-0.5 63,-0.5 63,63

## Text on the board
tNames: klanghabitat | Orbiter V3_2